# EAGLE board ArduinixMOD (EAGLE 7.2.0)
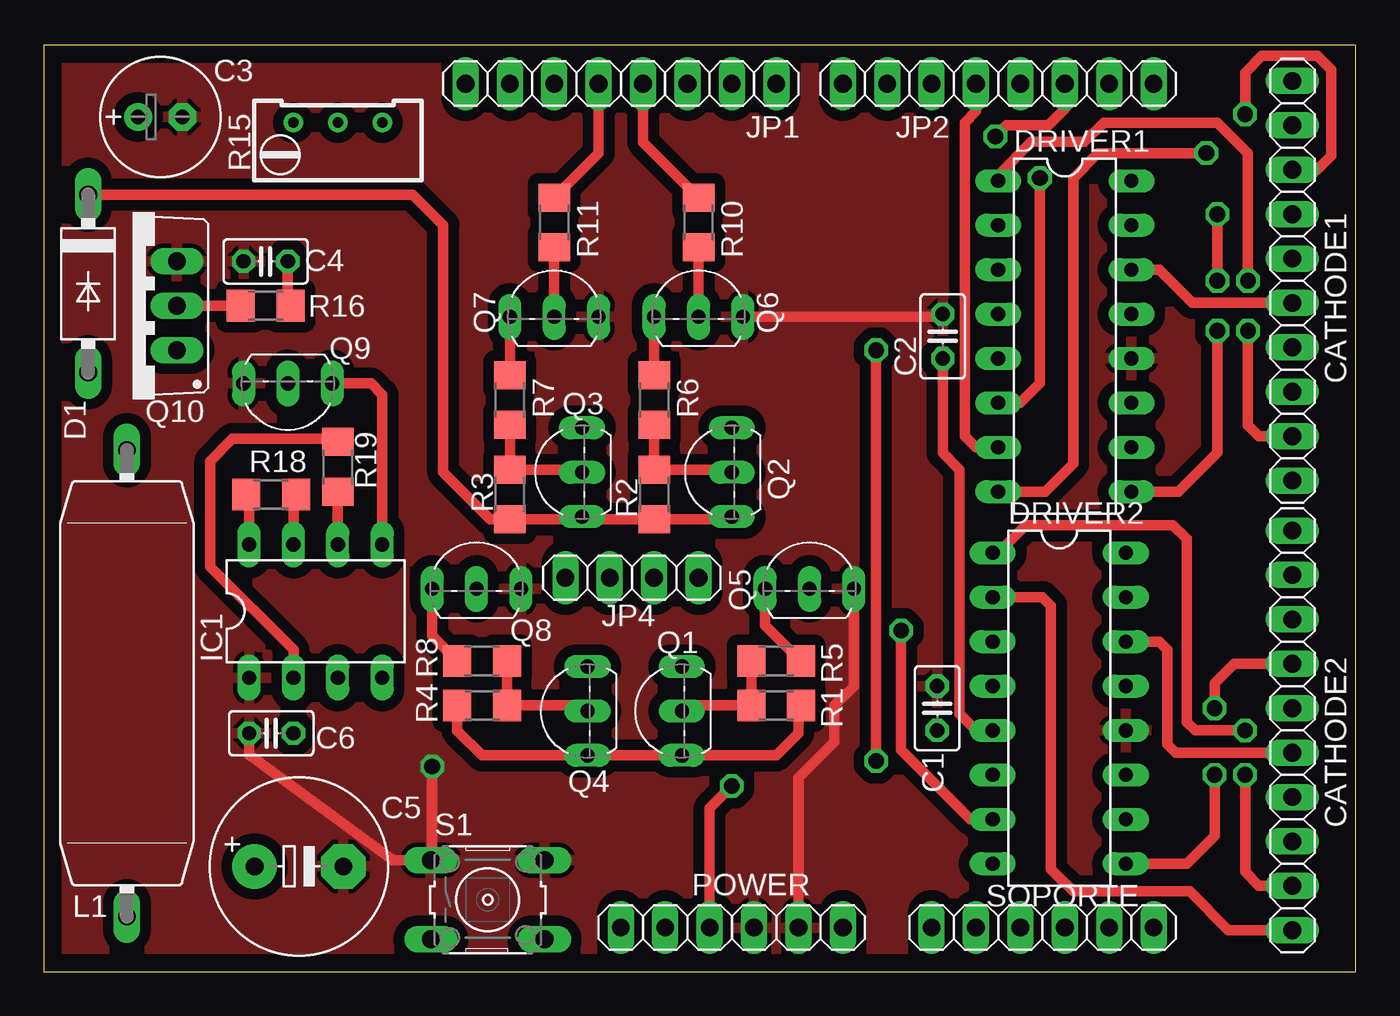
[diagram p0: board, top side]
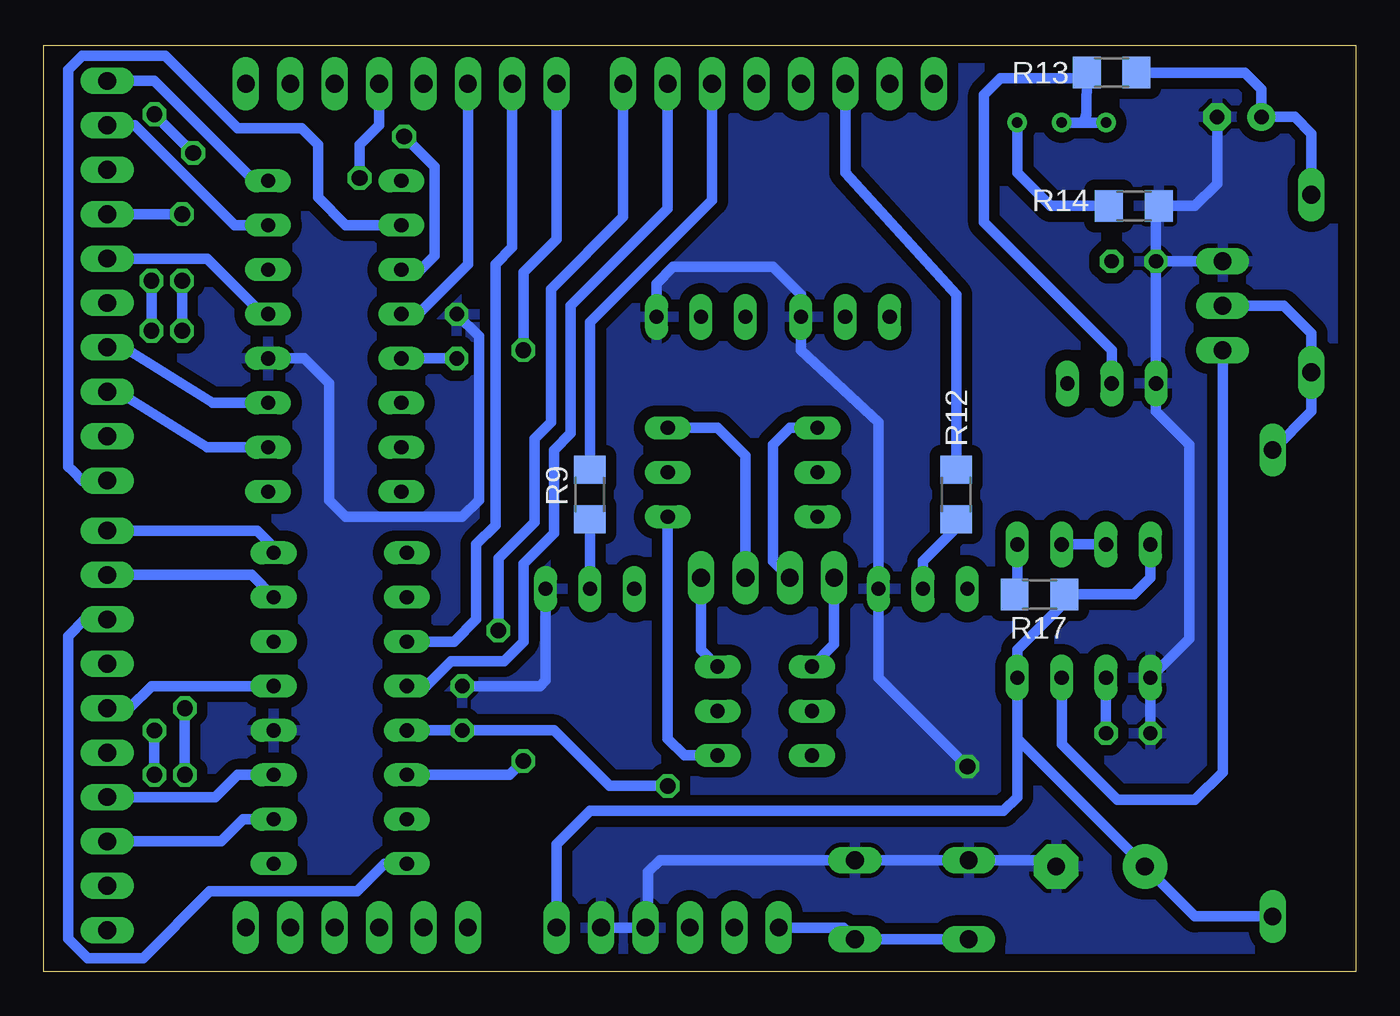
[diagram p1: board, bottom side, seen from below]

Size 75.07 x 53.01 mm. Coordinates in mm from the lower left corner, seen from the top.
Outline: 0,0 75.07,0 75.07,53.01 0,53.01 0,0
Copper layers (1*16): Top 0.035mm / dielectric 1.5mm / Bottom 0.035mm
Design rules "default": minimum track width 10mil, minimum drill 24mil, track to track 8mil, track to pad 8mil, pad to pad 8mil, via to via 8mil, smd to smd 8mil, copper to edge 40mil, drill to drill 8mil, minimum pad ring 10mil, minimum via ring 8mil, stop-mask expansion 4mil, vias tented up to drill 0mil, thermal gap 10mil

## Footprints (pad centres in the part's own frame; a part is rotated, then mirrored left to right if it is on the bottom)
C025-025X050 = drill 0.813 octagon: 1 -1.27,0; 2 1.27,0
E2,5-7 = drill 0.813 pad 1.6: + -1.27,0 | drill 0.813 pad 1.6 octagon: - 1.27,0
E5-10,5 = drill 1.016 pad 2.54: + -2.54,0 | drill 1.016 pad 2.54 octagon: - 2.54,0
1X10 = drill 1.016 long: 1 -11.43,0; 2 -8.89,0; 3 -6.35,0; 4 -3.81,0; 5 -1.27,0; 6 1.27,0; 7 3.81,0; 8 6.35,0; 9 8.89,0; 10 11.43,0
F126-10 = drill 1.016 long: A 5.08,0; C -5.08,0
DIL16 = drill 0.813 long: 1 -8.89,-3.81; 2 -6.35,-3.81; 3 -3.81,-3.81; 4 -1.27,-3.81; 5 1.27,-3.81; 6 3.81,-3.81; 7 6.35,-3.81; 8 8.89,-3.81; 9 8.89,3.81; 10 6.35,3.81; 11 3.81,3.81; 12 1.27,3.81; 13 -1.27,3.81; 14 -3.81,3.81; 15 -6.35,3.81; 16 -8.89,3.81
DIL-08 = drill 0.813 long: 1 -3.81,-3.81; 2 -1.27,-3.81; 3 1.27,-3.81; 4 3.81,-3.81; 5 3.81,3.81; 6 1.27,3.81; 7 -1.27,3.81; 8 -3.81,3.81
1X08 = drill 1.016 long: 1 -8.89,0; 2 -6.35,0; 3 -3.81,0; 4 -1.27,0; 5 1.27,0; 6 3.81,0; 7 6.35,0; 8 8.89,0
1X04 = drill 1.016 long: 1 -3.81,0; 2 -1.27,0; 3 1.27,0; 4 3.81,0
MESC26 = drill 1.016 long: 1 -13.335,0; 2 13.335,0
1X06 = drill 1.016 long: 1 -6.35,0; 2 -3.81,0; 3 -1.27,0; 4 1.27,0; 5 3.81,0; 6 6.35,0
TO92-CBE = drill 0.813 long: B 0,0; C 2.54,0; E -2.54,0
TO92-EBC = drill 0.813 long: B 0,-1.27; C -2.54,-1.27; E 2.54,-1.27
TO220BV = drill 1.016 long: D 0,-2.54; G -2.54,-2.54; S 2.54,-2.54
R1206 = smd 1.6 x 1.803: 1 -1.422,0; 2 1.422,0
RTRIM64W = drill 0.61: 1 1.27,-2.54; 2 1.27,0; 3 1.27,2.54
B3F-10XX = drill 1.016 long: 1 -3.251,2.261; 2 3.251,2.261; 3 -3.251,-2.261; 4 3.251,-2.261

## Placement (x,y rotation side)
C1  100nF  [C025-025X050]  51.12,15.08 90 top
C2  100nF  [C025-025X050]  51.44,36.35 90 top
C3  1uF 350V  [E2,5-7]  6.67,48.9 0 top
C4  47pF  [C025-025X050]  12.7,40.64 180 top
C5  470uF 25V  [E5-10,5]  14.61,6.03 0 top
C6  1uF  [C025-025X050]  13.02,13.65 180 top
CATHODE1  [1X10]  71.44,39.53 270 top
CATHODE2  [1X10]  71.44,13.81 270 top
D1  BYT01  [F126-10]  2.54,39.37 270 top
DRIVER1  74141N  [DIL16]  58.42,36.35 270 top
DRIVER2  74141N  [DIL16]  58.1,15.08 270 top
IC1  NE555  [DIL-08]  15.56,20.64 0 top
JP1  [1X08]  33.02,50.8 180 top
JP2  [1X08]  54.61,50.8 180 top
JP4  [1X04]  33.66,22.54 180 top
L1  100uH 1A  [MESC26]  4.76,16.51 270 top
POWER  [1X06]  39.37,2.54 0 top
Q1  MPSA92  [TO92-CBE]  36.51,14.92 90 top
Q2  MPSA92  [TO92-CBE]  39.37,28.57 90 top
Q3  MPSA92  [TO92-CBE]  30.8,28.57 90 top
Q4  MPSA92  [TO92-CBE]  31.11,14.92 90 top
Q5  MPSA42  [TO92-EBC]  43.81,23.18 0 top
Q6  MPSA42  [TO92-EBC]  37.47,38.73 0 top
Q7  MPSA42  [TO92-EBC]  29.21,38.73 0 top
Q8  MPSA42  [TO92-EBC]  24.77,23.18 0 top
Q9  MPSA42  [TO92-EBC]  13.97,32.38 180 top
Q10  IRF740  [TO220BV]  5.08,38.1 90 top
R1  100K  [R1206]  41.91,15.24 0 top
R2  100K  [R1206]  34.92,27.3 270 top
R3  100K  [R1206]  26.67,27.3 270 top
R4  100K  [R1206]  25.08,15.24 180 top
R5  470K  [R1206]  41.91,17.78 180 top
R6  470K  [R1206]  34.92,32.7 270 top
R7  470K  [R1206]  26.67,32.7 270 top
R8  470K  [R1206]  25.08,17.78 0 top
R9  33K  [R1206]  43.81,27.3 90 bottom
R10  33K  [R1206]  37.47,42.86 270 top
R11  33K  [R1206]  29.21,42.86 270 top
R12  33K  [R1206]  22.86,27.3 270 bottom
R13  220K  [R1206]  13.97,51.44 0 bottom
R14  470  [R1206]  12.7,43.81 180 bottom
R15  [RTRIM64W]  16.83,47.31 90 top
R16  1K  [R1206]  12.7,38.1 180 top
R17  33K  [R1206]  18.1,21.59 180 bottom
R18  1K  [R1206]  13.02,27.3 0 top
R19  10K  [R1206]  16.83,28.89 90 top
S1  [B3F-10XX]  25.4,4.13 0 top
SOPORTE  [1X06]  57.15,2.54 0 top

## Library data of the parts
C1-C6 R1-R19 = rcl
CATHODE1 CATHODE2 JP1 JP2 JP4 POWER SOPORTE = pinhead
D1 = diode
DRIVER1 DRIVER2 = 74xx-eu
IC1 = st-microelectronics; MF: Arrow Electronics; MPN: NE555N; OC_FARNELL: 1467742; OC_NEWARK: 89K1486
L1 = inductors
Q1-Q4 = transistor-pnp
Q5-Q9 = transistor-npn
Q10 = transistor-power
S1 = switch-omron; MPN: B3F-1000; OC_FARNELL: 176432; OC_NEWARK: 36M3542

## Nets
9V: C5.+ IC1.4 IC1.8 L1.2 POWER.6 R17.1 R18.1
+5V: C1.1 C2.1 DRIVER1.5 DRIVER2.5 POWER.3
GND: C1.2 C2.2 C3.- C4.2 C5.- C6.2 DRIVER1.12 DRIVER2.12 IC1.1 POWER.4 POWER.5 Q5.E Q6.E Q7.E Q8.E Q9.E Q10.S R14.1 S1.1 S1.2
N$1: CATHODE2.9 DRIVER2.1
N$2: CATHODE2.10 DRIVER2.2
N$3: DRIVER2.3 JP2.7
N$4: DRIVER2.4 JP1.2
N$5: DRIVER2.6 JP2.8
N$6: DRIVER2.7 JP1.1
N$7: CATHODE2.3 DRIVER2.8
N$8: CATHODE2.4 DRIVER2.9
N$9: CATHODE2.8 DRIVER2.10
N$10: CATHODE2.7 DRIVER2.11
N$11: DRIVER1.4 JP2.6
N$12: CATHODE2.5 DRIVER2.13
N$13: CATHODE2.6 DRIVER2.14
N$14: CATHODE2.2 DRIVER2.15
N$15: CATHODE2.1 DRIVER2.16
N$16: DRIVER1.6 JP2.4
N$17: DRIVER1.7 JP2.5
N$18: CATHODE1.3 DRIVER1.8
N$19: CATHODE1.9 DRIVER1.1
N$20: CATHODE1.10 DRIVER1.2
N$21: DRIVER1.3 JP2.3
N$22: CATHODE1.4 DRIVER1.9
N$23: CATHODE1.8 DRIVER1.10
N$24: CATHODE1.7 DRIVER1.11
N$25: CATHODE1.5 DRIVER1.13
N$26: CATHODE1.6 DRIVER1.14
N$27: CATHODE1.2 DRIVER1.15
N$28: CATHODE1.1 DRIVER1.16
N$29: Q1.B R1.1 R5.2
N$30: Q2.B R2.1 R6.2
N$31: Q3.B R3.1 R7.2
N$32: Q4.B R4.1 R8.2
N$33: D1.A L1.1 Q10.D R16.2
N$34: JP4.2 Q2.C
N$35: JP1.3 R9.2
N$36: JP4.1 Q1.C
N$37: JP1.4 R10.1
N$38: JP4.3 Q3.C
N$39: JP4.4 Q4.C
N$40: Q5.C R5.1
N$41: Q6.C R6.1
N$42: Q5.B R9.1
N$43: Q6.B R10.2
N$44: Q7.B R11.2
N$45: Q7.C R7.1
N$46: Q8.C R8.1
N$47: Q8.B R12.2
N$48: JP1.5 R11.1
N$49: JP1.6 R12.1
N$50: Q9.B R13.1 R15.2 R15.3
N$51: C4.1 R16.1
N$52: R14.2 R15.1
N$53: C3.+ D1.C Q1.E Q2.E Q3.E Q4.E R1.2 R2.2 R3.2 R4.2 R13.2
N$54: IC1.6 IC1.7 R18.2 R19.1
N$55: C6.1 IC1.2 R19.2
N$56: POWER.1 S1.3 S1.4
N$60: IC1.5 Q9.C R17.2
N$62: IC1.3 Q10.G

## Tracks (layer width: path | path; a pad name or v marks a point on that pad's centre or on a via)
9V
  Top 0.61: IC1.8 11.75,27.15 R18.1
  Bottom 0.61: L1.2 9.21,3.17 C5.+ 19.37,13.34 | 19.37,13.34 19.37,13.49 IC1.4 19.37,18.41 16.68,21.11 R17.1 12.7,21.59 11.75,22.54 IC1.8 | POWER.6 45.72,7.3 43.81,9.21 20.16,9.21 19.37,10 19.37,13.34
+5V  (via drill 0.9)
  Top 0.61: POWER.3 38.1,9.37 v39.37,10.64 | DRIVER2.5 53.34,13.81 52.39,14.76 52.39,28.73 51.44,29.69 C2.1
  Bottom 0.61: DRIVER2.5 C1.1 45.88,13.81 42.7,10.64 v39.37,10.64 | C2.1 DRIVER1.5
GND  (via drill 0.9)
  Top 0.61: C6.2 11.75,12.42 20,6.39 S1.1 22.23,6.46 v22.23,11.75 | Q6.E 50.96,37.47 C2.2 | Q5.E 46.35,16.35 45.24,15.24 45.24,13.18 43.18,11.11 POWER.5
  Bottom 0.61: C5.- 17.5,6.39 S1.1 S1.2 39.81,6.39 40.48,5.71 40.48,2.7 POWER.4 POWER.5 | C6.2 IC1.1 9.53,19.05 9.53,30.16 11.43,32.07 Q9.E C4.2 | Q10.S C4.2 | C3.- 7.94,45.09 9.21,43.81 R14.1 11.43,43.66 C4.2 | Q6.E 40.01,39.37 39.05,40.32 33.34,40.32 31.75,38.73 Q7.E 31.75,35.56 27.3,31.43 Q8.E 27.3,16.83 v22.23,11.75 | C1.2 46.67,16.35 46.35,16.67 Q5.E | DRIVER1.12 60.17,35.08 58.74,33.66 58.74,26.99 57.78,26.04 51.12,26.04 50.16,26.99 50.16,36.35 C2.2
  pour Bottom (isolate 0.61): 0,53.34 74.93,53.34 74.93,46.99 74.93,0 0,0 0,2.54 0,13.97 0,31.75 0,45.72
  pour Top (isolate 0.61): 0,53.02 75.09,53.02 75.09,45.09 75.09,0.16 0.16,0.16 0.16,7.62 0,7.62
N$1  (via drill 0.9)
  Top 0.61: DRIVER2.1 54.61,23.97 56.2,25.56 64.61,25.56 65.41,24.77 65.41,14.29 65.88,13.81 v68.74,13.81 | v68.74,11.27 68.74,5.71 69.53,4.92 CATHODE2.9
  Bottom 0.61: v68.74,13.81 v68.74,11.27
N$2
  Top 0.61: DRIVER2.2 57.15,21.43 57.63,20.95 57.63,5.87 58.9,4.6 65.56,4.6 67.79,2.38 CATHODE2.10
N$3
  Bottom 0.61: JP2.7 48.26,41.43 49.21,40.48 49.21,25.56 50.32,24.45 50.32,20.16 51.59,18.89 DRIVER2.3
N$4
  Bottom 0.61: JP1.2 39.37,43.66 44.93,38.1 44.93,30.8 45.88,29.84 45.88,25.08 47.62,23.34 47.62,18.89 48.74,17.78 51.75,17.78 53.18,16.35 DRIVER2.4
N$5  (via drill 0.9)
  Top 0.61: v47.62,12.06 v47.62,35.56
  Bottom 0.61: DRIVER2.6 48.42,11.27 v47.62,12.06 | JP2.8 45.72,41.91 47.62,40.01 v47.62,35.56
N$6  (via drill 0.9)
  Top 0.61: DRIVER2.7 53.02,8.73 49.05,12.7 v49.05,19.53
  Bottom 0.61: JP1.1 41.91,43.18 46.04,39.05 46.04,31.43 46.99,30.48 46.99,25.72 49.05,23.65 v49.05,19.53
N$7
  Bottom 0.61: DRIVER2.8 55.56,6.19 57.15,4.6 65.56,4.6 69.37,0.79 72.55,0.79 73.66,1.91 73.66,19.21 72.71,20.16 CATHODE2.3
N$8  (via drill 0.9)
  Top 0.61: v66.99,15.08 66.99,16.51 68.1,17.62 CATHODE2.4 | DRIVER2.9 65.41,6.19 66.99,7.78 v66.99,11.27
  Bottom 0.61: v66.99,11.27 v66.99,15.08
N$9
  Bottom 0.61: DRIVER2.10 63.66,8.73 64.93,7.46 CATHODE2.8
N$10
  Bottom 0.61: DRIVER2.11 63.98,11.27 65.25,10 CATHODE2.7
N$11
  Bottom 0.61: JP2.6 50.8,40.48 53.66,37.62 DRIVER1.4
N$12
  Bottom 0.61: DRIVER2.13 68.9,16.35 70.17,15.08 CATHODE2.5
N$13
  Top 0.61: DRIVER2.14 63.82,18.89 64.29,18.41 64.29,13.02 64.77,12.54 CATHODE2.6
N$14
  Bottom 0.61: DRIVER2.15 63.18,22.7 CATHODE2.2
N$15
  Bottom 0.61: DRIVER2.16 61.91,24.29 62.87,25.24 CATHODE2.1
N$16  (via drill 0.9)
  Top 0.61: DRIVER1.6 55.88,32.54 56.99,33.66 v56.99,45.4
  Bottom 0.61: v56.99,45.4 56.99,47.31 55.88,48.42 JP2.4
N$17
  Top 0.61: JP2.5 53.34,49.21 52.7,48.58 52.7,30.64 53.34,30 DRIVER1.7
N$18  (via drill 0.9)
  Top 0.61: DRIVER1.8 57.31,27.46 58.9,29.05 58.9,45.4 60.33,46.83 v66.52,46.83 | CATHODE1.3 72.87,45.88 73.66,46.67 73.66,51.59 72.87,52.39 69.69,52.39 68.74,51.44 v68.74,49.05
  Bottom 0.61: v68.74,49.05 v66.52,46.83
N$19  (via drill 0.9)
  Top 0.61: v68.9,36.67 68.9,31.27 69.53,30.64 CATHODE1.9 | DRIVER1.1 54.61,45.56 56.52,47.47 59.53,47.47 60.64,48.58 67.15,48.58 68.9,46.83 v68.9,39.53
  Bottom 0.61: v68.9,39.53 v68.9,36.67
N$20
  Bottom 0.61: DRIVER1.2 57.78,42.7 59.37,44.29 59.37,47.31 60.33,48.26 63.98,48.26 68.1,52.39 72.87,52.39 73.66,51.59 73.66,28.89 73.42,28.65 72.87,28.1 CATHODE1.10
N$21  (via drill 0.9)
  Top 0.61: JP2.3 58.42,49.37 58.1,49.05 57.78,48.74 57.47,48.42 55.09,48.42 v54.45,47.78
  Bottom 0.61: DRIVER1.3 53.5,40.16 52.7,40.96 52.7,46.04 v54.45,47.78
N$22  (via drill 0.9)
  Top 0.61: DRIVER1.9 64.93,27.46 67.15,29.69 v67.15,36.67 | v67.15,39.53 v67.15,43.34
  Bottom 0.61: v67.15,36.67 v67.15,39.53 | v67.15,43.34 CATHODE1.4
N$23
  Bottom 0.61: DRIVER1.10 65.72,30 70.8,33.18 CATHODE1.8
N$24
  Bottom 0.61: DRIVER1.11 65.41,32.54 70.48,35.72 CATHODE1.7
N$25
  Bottom 0.61: CATHODE1.5 65.72,40.8 62.55,37.62 DRIVER1.13
N$26
  Top 0.61: DRIVER1.14 63.82,40.16 65.72,38.26 CATHODE1.6
N$27
  Bottom 0.61: DRIVER1.15 64.14,42.7 69.85,48.42 CATHODE1.2
N$28
  Bottom 0.61: DRIVER1.16 63.02,45.24 68.74,50.96 CATHODE1.1
N$29
  Top 0.61: Q1.B 37.15,15.24 R1.1 R5.2
N$30
  Top 0.61: Q2.B 39.22,28.73 R2.1 R6.2
N$31
  Top 0.61: Q3.B 30.64,28.73 R3.1 R7.2
N$32
  Top 0.61: R8.2 R4.1 30.8,15.24 Q4.B
N$33
  Top 0.61: Q10.D R16.2
  Bottom 0.61: Q10.D 4.13,38.1 2.54,36.51 D1.A 2.54,32.07 L1.1
N$34
  Bottom 0.61: JP4.2 34.92,29.53 36.51,31.11 Q2.C
N$35
  Bottom 0.61: JP1.3 36.83,44.13 43.81,37.15 R9.2
N$36
  Bottom 0.61: JP4.1 37.47,18.41 Q1.C
N$37
  Top 0.61: JP1.4 34.29,47.46 R10.1
N$38
  Bottom 0.61: Q3.C 32.38,31.11 33.34,30.16 33.34,23.5 JP4.3
N$39
  Bottom 0.61: JP4.4 29.84,18.73 Q4.C
N$40
  Top 0.61: Q5.C 41.27,19.84 R5.1
N$41
  Top 0.61: Q6.C R6.1
N$42
  Bottom 0.61: Q5.B R9.1
N$43
  Top 0.61: R10.2 Q6.B
N$44
  Top 0.61: R11.2 Q7.B
N$45
  Top 0.61: Q7.C R7.1
N$46
  Top 0.61: Q8.C 22.23,19.21 R8.1
N$47
  Bottom 0.61: R12.2 22.86,25.4 24.77,23.5 Q8.B
N$48
  Top 0.61: JP1.5 31.75,46.83 R11.1
N$49
  Bottom 0.61: R12.1 22.86,38.73 29.21,45.72 JP1.6
N$50
  Bottom 0.61: R15.3 15.56,48.58 | 15.56,48.58 R15.2 | 15.56,48.58 15.4,49.05 R13.1 15.71,51.12 20.32,51.12 21.27,50.16 21.27,42.86 13.97,35.56 Q9.B
N$51
  Top 0.61: C4.1 13.97,38.25 R16.1
N$52
  Bottom 0.61: R15.1 19.37,45.72 17.46,43.81 R14.2
N$53
  Top 0.61: Q2.E 39.22,25.88 R2.2 30.95,25.88 Q3.E 30.64,25.88 R3.2 25.55,25.88 22.86,28.57 22.86,42.7 21.11,44.45 D1.C | R4.2 23.66,13.8 25.08,12.38 Q4.E Q1.E 41.91,12.38 43.18,13.65 43.18,15.09 R1.2
  Bottom 0.61: D1.C 2.54,47.94 3.49,48.9 C3.+ 5.4,50.48 6.35,51.44 R13.2 | Q2.E 39.37,13.34 38.42,12.38 Q1.E
N$54
  Top 0.61: IC1.7 14.29,27.15 R18.2 | IC1.6 R19.1
  Bottom 0.61: IC1.7 IC1.6
N$55
  Top 0.61: IC1.2 14.29,18.41 9.53,23.18 9.53,29.21 10.79,30.48 16.66,30.48 R19.2
  Bottom 0.61: IC1.2 C6.1
N$56
  Bottom 0.61: S1.3 S1.4 29.32,2.54 POWER.1
N$60
  Top 0.61: Q9.C 18.73,33.66 19.37,33.02 IC1.5
  Bottom 0.61: IC1.5 19.37,21.74 R17.2
N$62
  Bottom 0.61: Q10.G 7.62,11.43 9.21,9.84 13.65,9.84 16.83,13.02 IC1.3